# Altium PCB NEW_PCB.pcbdoc
Units mm, origin at the board's own origin, x right, y up, seen from the top; angles counter-clockwise.
Board outline 45.58 x 36.07 mm, 2 copper layers (Top Layer, Bottom Layer); 3 components, 8 nets, 33 pads, 3 vias.
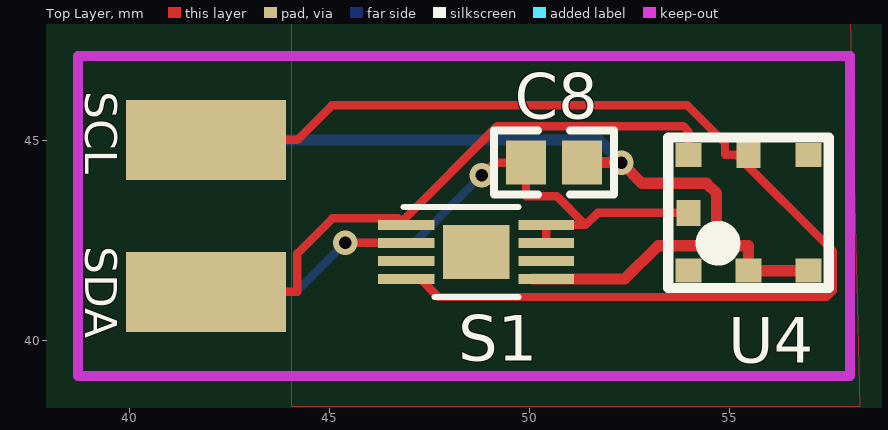
[diagram p0: Top Layer view]
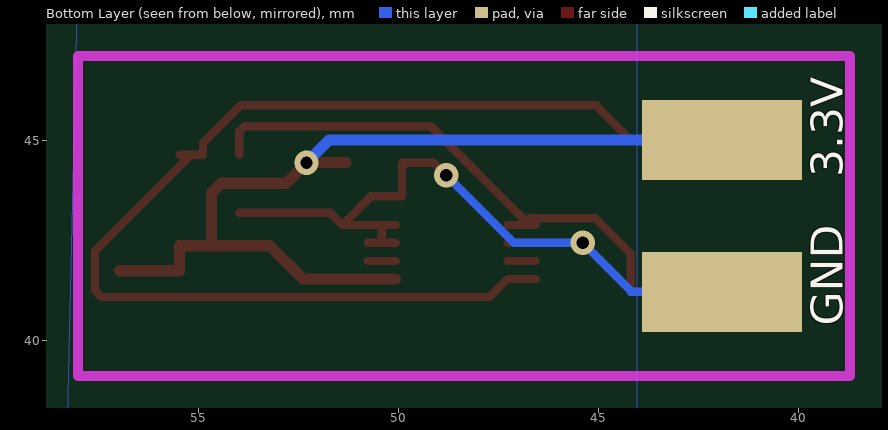
[diagram p1: Bottom Layer view, seen from below]

## Layer stack, top to bottom
Top Layer: signal copper (thickness not stored)
Dielectric: dielectric 0.32, FR-4, Dk 4.8
Bottom Layer: signal copper (thickness not stored)

## Board outline
70.977,25.4 25.4,25.4 25.4,61.468 70.977,61.468

## Components (designator, comment, footprint, x,y, rotation, side; value= is the part's Value field where it differs from the comment)
C8 "CAP-0603" ?#1 51.419,44.45 r180 top
S1 "SHT31-DIS-B" ?#2 48.651,42.23 r270 top
U4 "BMP180" ?#3 55.483,43.196 r180 top

## Footprints (in the part's own frame and the unit in brackets; to place one, negate y for a bottom-side part, rotate by r counter-clockwise, add the part's x,y. Pads: shape width x height; smd on the part's side, far side on the other; paste and mask are expansions set on the pad)
?#1 [mm]
  rect 0.998x1.102 smd: 1(0.1,0) 2(1.5,0)
  silkscreen extent -0.7,-0.8 2.3,0.8
?#2 [mm]
  rect 0.249x0.701 smd: 1(-0.661,-1.372) 2(-0.211,-1.372)
  rect 0.251x0.701 smd: 3(0.24,-1.372) 4(0.689,-1.372)
  rect 0.251x0.699 smd: 5(0.689,1.428) 6(0.24,1.428)
  rect 0.249x0.699 smd: 7(-0.211,1.428) 8(-0.661,1.428)
  rect 0.681x0.831 smd: 9(-0.325,0.443) 9(-0.325,-0.388)
  rect 0.678x0.831 smd: 9(0.354,0.443) 9(0.354,-0.388)
  silkscreen extent -1.11,-1.8 1.14,1.08
?#3 [mm]
  rect 0.65x0.599 smd: 1(1.498,1.449) 2(0,1.449) 3(-1.499,1.449) 4(-1.499,-1.447) 6(1.498,-1.447)
  rect 0.599x0.65 smd: 5(0,-1.447) 7(1.498,0.001)
  silkscreen extent -2.01,-1.88 2.01,1.88

## Free pads (board coordinates)
  rect 0.701x0.249 smd: 1(46.578,42.89) 2(46.578,42.441)
  rect 0.701x0.251 smd: 3(46.578,41.99) 4(46.578,41.54)
  rect 0.699x0.251 smd: 5(50.775,41.54) 6(50.775,41.99)
  rect 0.699x0.249 smd: 7(50.775,42.441) 8(50.775,42.89)
  rect 4x2.002 smd far side: 30(41.918,41.216) 30(41.918,45.016)
  rect 4x2.002 smd: 30(41.918,41.216) 30(41.918,45.016)

## Via types
v1: diameter 0.61, hole 0.31, Top Layer to Bottom Layer, 3 vias

## Nets (pads, with @x,y where several pads share a name; then routed paths per layer and width w, separated by ;. In a path a pad name is that pad's centre, name@x,y a point inside that pad or via, vN(x,y) a via of type N, cw(c..) or ccw(c..) an arc to the next point about the centre after c; other vN are vias at no path point)
3.3V: C8.1 pad.5 pad.30@41.918,45.016 S1.5 U4.2 U4.3 | length 23.5
  Top Layer w0.28: S1.5@50.08,41.539 50.776,41.539 52.389,41.539 53.22,42.37 54.683,42.37 ; C8.1@51.32,44.45 52.138,44.45 v1(52.308,44.45) 52.823,43.932 54.439,43.932 54.683,43.688 54.683,42.37 ; U4.3 U4.2 55.483,42.37 54.683,42.37
  Bottom Layer w0.28: pad.30@41.919,45.016 51.741,45.016 v1(52.308,44.45)
GND: C8.2 pad.2 pad.7 pad.8 pad.30@41.918,41.216 S1.2 S1.7 S1.8 U4.7 | length 19
  Top Layer w0.21: v1(45.399,42.441) pad.2 S1.2 ; v1(48.818,44.137) 48.82,44.137 49.133,44.45 49.92,44.45 49.92,43.612 50.69,43.612 51.411,42.89 ; S1.7@50.08,42.441 pad.7@50.428,42.441 ; S1.8@50.08,42.89 pad.8@50.428,42.89 ; pad.7@50.776,42.441 pad.7@50.428,42.441 ; U4.7 51.719,43.195 51.411,42.89 ; pad.7@50.428,42.441 pad.8@50.428,42.89 ; pad.8@50.428,42.89 50.776,42.89 51.411,42.89
  Bottom Layer w0.21: pad.30@41.919,41.216 44.205,41.216 44.205,41.249 v1(45.399,42.441) 47.121,42.441 v1(48.818,44.137)
S1_3: pad.3 S1.3 | length 0.7
  Top Layer w0.21: pad.3 S1.3
S1_6: pad.6 S1.6 | length 0.7
  Top Layer w0.21: S1.6@50.08,41.989 pad.6@50.776,41.989
S$67: 
S$69: 
SCL: pad.4 pad.30@41.918,45.016 S1.4 U4.5 | length 30.3
  Top Layer w0.21: pad.30@41.919,45.016 44.205,45.016 45.069,45.88 53.954,45.88 54.896,44.938 54.896,44.643 U4.5@55.191,44.643 ; pad.4 S1.4 47.728,41.089 57.439,41.089 57.596,41.247 57.596,42.237 U4.5@55.191,44.643 ; U4.5 U4.5@55.191,44.643
SDA: pad.1 pad.30@41.918,41.216 S1.1 U4.6 | length 15.9
  Top Layer w0.21: pad.30@41.919,41.216 44.205,41.216 44.205,42.182 45.082,43.055 46.73,43.055 pad.1@46.898,42.89 ; pad.1 pad.1@46.898,42.89 ; S1.1 47.215,42.89 pad.1@46.898,42.89 ; U4.6 53.984,45.23 53.857,45.359 49.201,45.359 46.898,43.055 pad.1@46.898,42.89
pads on no net: S1.9 U4.1 U4.4

## Polygon pours and split planes (outlines as drawn)
GND on Bottom Layer (solid): 44.053,48.768 44.053,38.1 58.277,38.1 58.023,48.768 44.053,48.768
GND on Top Layer (solid): 44.053,48.768 44.053,38.354 58.277,38.354 58.023,48.514 44.053,48.768

## Silkscreen, mask and mechanical layers (free items; w line width, h text height)
Top Overlay:
  text "SCL" at 38.901,46.228 h0.8 r270
  text "SDA" at 38.898,42.358 h0.8 r270
Bottom Overlay:
  text "3.3V" at 38.9,44.089 h0.8 r270
  text "GND" at 38.901,40.374 h0.8 r270